# EAGLE board 12to5Vconverter (1) (EAGLE 9.3.0)
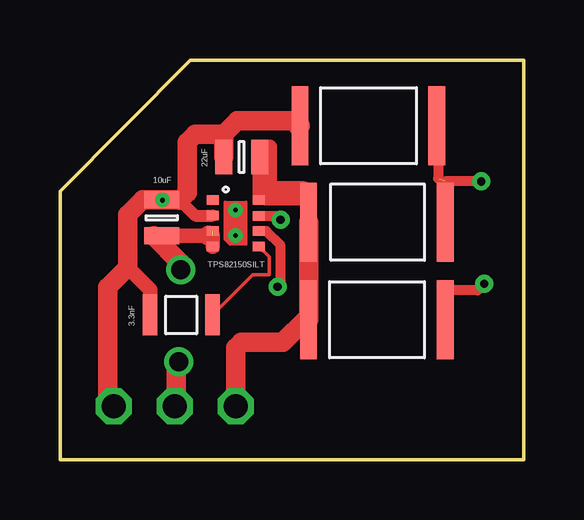
[diagram p0: board, top side]
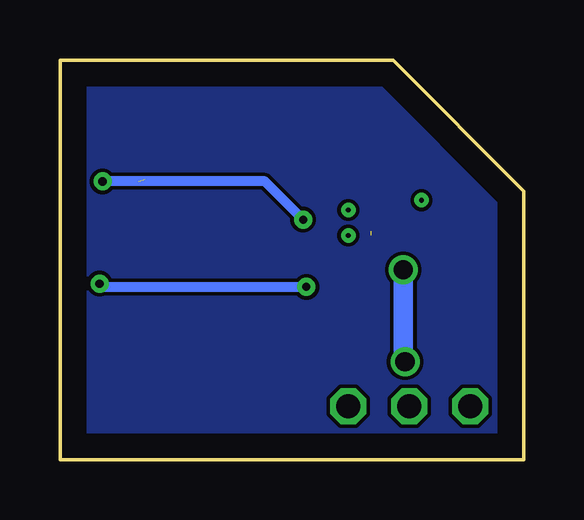
[diagram p1: board, bottom side, seen from below]

Size 19.33 x 16.66 mm. Coordinates in mm from the lower left corner, seen from the top.
Outline: 5.44,16.66 19.33,16.66 19.33,0 0,0 0,11.2 5.44,16.66
Copper layers (1*16): Top 0.035mm / dielectric 1.5mm / Bottom 0.035mm
Design rules "default *": minimum track width 6mil, minimum drill 0.35mm, track to track 6mil, track to pad 6mil, pad to pad 6mil, via to via 6mil, smd to smd 6mil, copper to edge 40mil, drill to drill 6mil, minimum pad ring 10mil, minimum via ring 8mil, stop-mask expansion 2mil, vias tented up to drill 0mil, thermal gap 10mil

## Footprints (pad centres in the part's own frame; a part is rotated, then mirrored left to right if it is on the bottom)
GRT21BR61E226ME13L = smd 0.7 x 1.45: P$1 -0.75,0; P$2 0.75,0
RC2512FK-07100KL = smd 0.7 x 3.3: P$1 2.85,0; P$2 -2.85,0
RC2512FK-07249KL = smd 0.7 x 3.3: P$1 2.85,0; P$2 -2.85,0
RC2512FK-0747KL = smd 0.7 x 3.3: P$1 2.85,0; P$2 -2.85,0
C1206C332K1RECAUTO = smd 0.6 x 1.7: P$1 -1.3,0; P$2 1.3,0
CC0805KFX5R8BB106 = smd 0.7 x 1.45: P$1 -0.75,0; P$2 0.75,0
TPS82150SILT = smd 0.4 x 0.5: EN 0.97,-0.96; FB -0.31,0.97; GND -0.32,-0.96; PG 0.32,0.97; SS/TR 0.97,0.97; VIN 0.32,-0.96; VOUT -0.97,-0.96; VOUT2 -0.97,0.97

## Placement (x,y rotation side)
E$4  [GRT21BR61E226ME13L]  7.57,12.62 180 top
E$5  [RC2512FK-07100KL]  13.21,5.84 0 top
E$8  [RC2512FK-07249KL]  13.21,9.91 0 top
E$9  [RC2512FK-0747KL]  12.85,13.92 0 top
E$10  [C1206C332K1RECAUTO]  5.05,6.05 180 top
E$11  [CC0805KFX5R8BB106]  4.24,10.08 90 top
E$12  [TPS82150SILT]  7.32,9.86 270 top

## Library data of the parts
E$4 E$5 E$8-E$12 = Library_Capstone

## Nets
S$2: E$11.P$1 E$12.EN E$12.VIN
S$3: E$5.P$1 E$12.PG
S$5: E$4.P$1 E$5.P$2 E$8.P$2 E$12.VOUT2
S$6: E$8.P$1 E$9.P$1 E$12.FB
S$8: E$4.P$2 E$9.P$2 E$10.P$2 E$11.P$2 E$12.GND
S$10: E$10.P$1 E$12.SS/TR

## Tracks (layer width: path | path; a pad name or v marks a point on that pad's centre or on a via)
S$1  (via drill 1)
  other vias: 2.24,2.24
S$2  (via drill 0.8)  (1 unrouted)
  Top 0.61: E$12.EN 6.36,9.36 6.35,9.36 6.21,9.36 | 3.9,9.33 E$11.P$1 | 6.18,9.33 E$11.P$1 | E$11.P$1
  Top 0.813: 6.18,9.33 6.21,9.36 | v5.03,7.93 5.03,8.2 3.9,9.33 | v4.95,4.09 4.85,3.99 4.85,2.31 4.78,2.24
  Bottom 0.813: v5.03,7.93 5.03,4.17 v4.95,4.09
S$3  (via drill 0.35)
  Top 0.152: E$12.PG 8.6,9.54 | 16.06,7.06 E$5.P$1
  Top 0.406: 8.6,9.54 9.17,8.97 9.17,7.32 v9.07,7.21 | v17.68,7.34 17.4,7.06 16.06,7.06
  Bottom 0.152: v17.68,7.34 17.55,7.21
  Bottom 0.406: 17.55,7.21 v9.07,7.21
S$4  (via drill 1)
  other vias: 7.32,2.24
S$5
  Top 0.152: E$12.VOUT2 8.31,10.83 8.42,10.94 8.6,11.11 8.74,11.25 | 8.64,13.26 8.64,12.94 | E$4.P$1 8.64,12.94 | 8.64,12.94 8.74,13.04
  Top 0.406: E$5.P$2 10.29,5.91
  Top 0.508: 10.1,11.11 10.41,10.8 10.36,10.74 E$8.P$2
  Top 0.61: E$4.P$1 8.32,10.94 8.42,10.94 | 8.74,13.04 8.74,11.25
  Top 0.813: E$8.P$2 E$5.P$2 | 10.29,5.91 9.29,4.9 7.54,4.9 7.32,4.67 7.32,2.24
  Top 1.016: 8.6,11.11 10.1,11.11
S$6  (via drill 0.35)  (1 unrouted)
  Top 0.152: E$12.FB | 15.8,11.68 15.75,11.74
  Top 0.406: E$9.P$1 15.75,13.87 15.75,11.74 | E$8.P$1 16.06,11.61 v17.55,11.61 | v9.2,10.01 9.04,10.16 E$12.FB
  Bottom 0.406: v9.2,10.01 10.8,11.61 v17.55,11.61
S$7  (via drill 1)
  other vias: 4.78,2.24
S$8
  Top 0.152: 4.32,10.88 4.29,10.88 E$11.P$2
  Top 0.508: E$12.GND 5.64,10.18 5,10.82 4.98,10.84
  Top 0.61: E$10.P$2 3.75,7.09 2.82,8.02 | E$11.P$2 4.27,10.86 5.03,10.86
  Top 0.813: E$9.P$2 9.9,13.92 9.7,14.12 7.38,14.12 6.82,13.56 | 2.24,2.24 1.98,2.49 1.98,7.18 2.82,8.02 2.82,10.21 3.44,10.83 E$11.P$2 | 6.82,13.56 E$4.P$2 | 6.82,13.56 5.64,13.56 5.31,13.23 5.31,11.14 5,10.82 | 4.18,10.84 4.98,10.84 5,10.84 5.03,10.86
  pour Bottom: 0.2,11.13 5.56,16.48 19.13,16.48 19.13,0.18 0.2,0.18
S$10
  Top 0.152: E$10.P$1 8.03,7.72 8.71,7.72 8.71,8.46 E$12.SS/TR
S$11  (via drill 0.2)
  other vias: 7.32,10.41
S$12  (via drill 0.2)
  other vias: 7.32,9.35
S$13  (via drill 0.2)
  other vias: 4.27,10.82

## Text on the board
Document: gnd | 12Vin | 5Vout